# Altium PCB inverter.PcbDoc
Units mm, origin at the board's own origin, x right, y up, seen from the top; angles counter-clockwise.
Board outline 103.51 x 87.38 mm, 2 copper layers (Top Layer, Bottom Layer); 33 components, 20 nets, 87 pads, 0 vias.
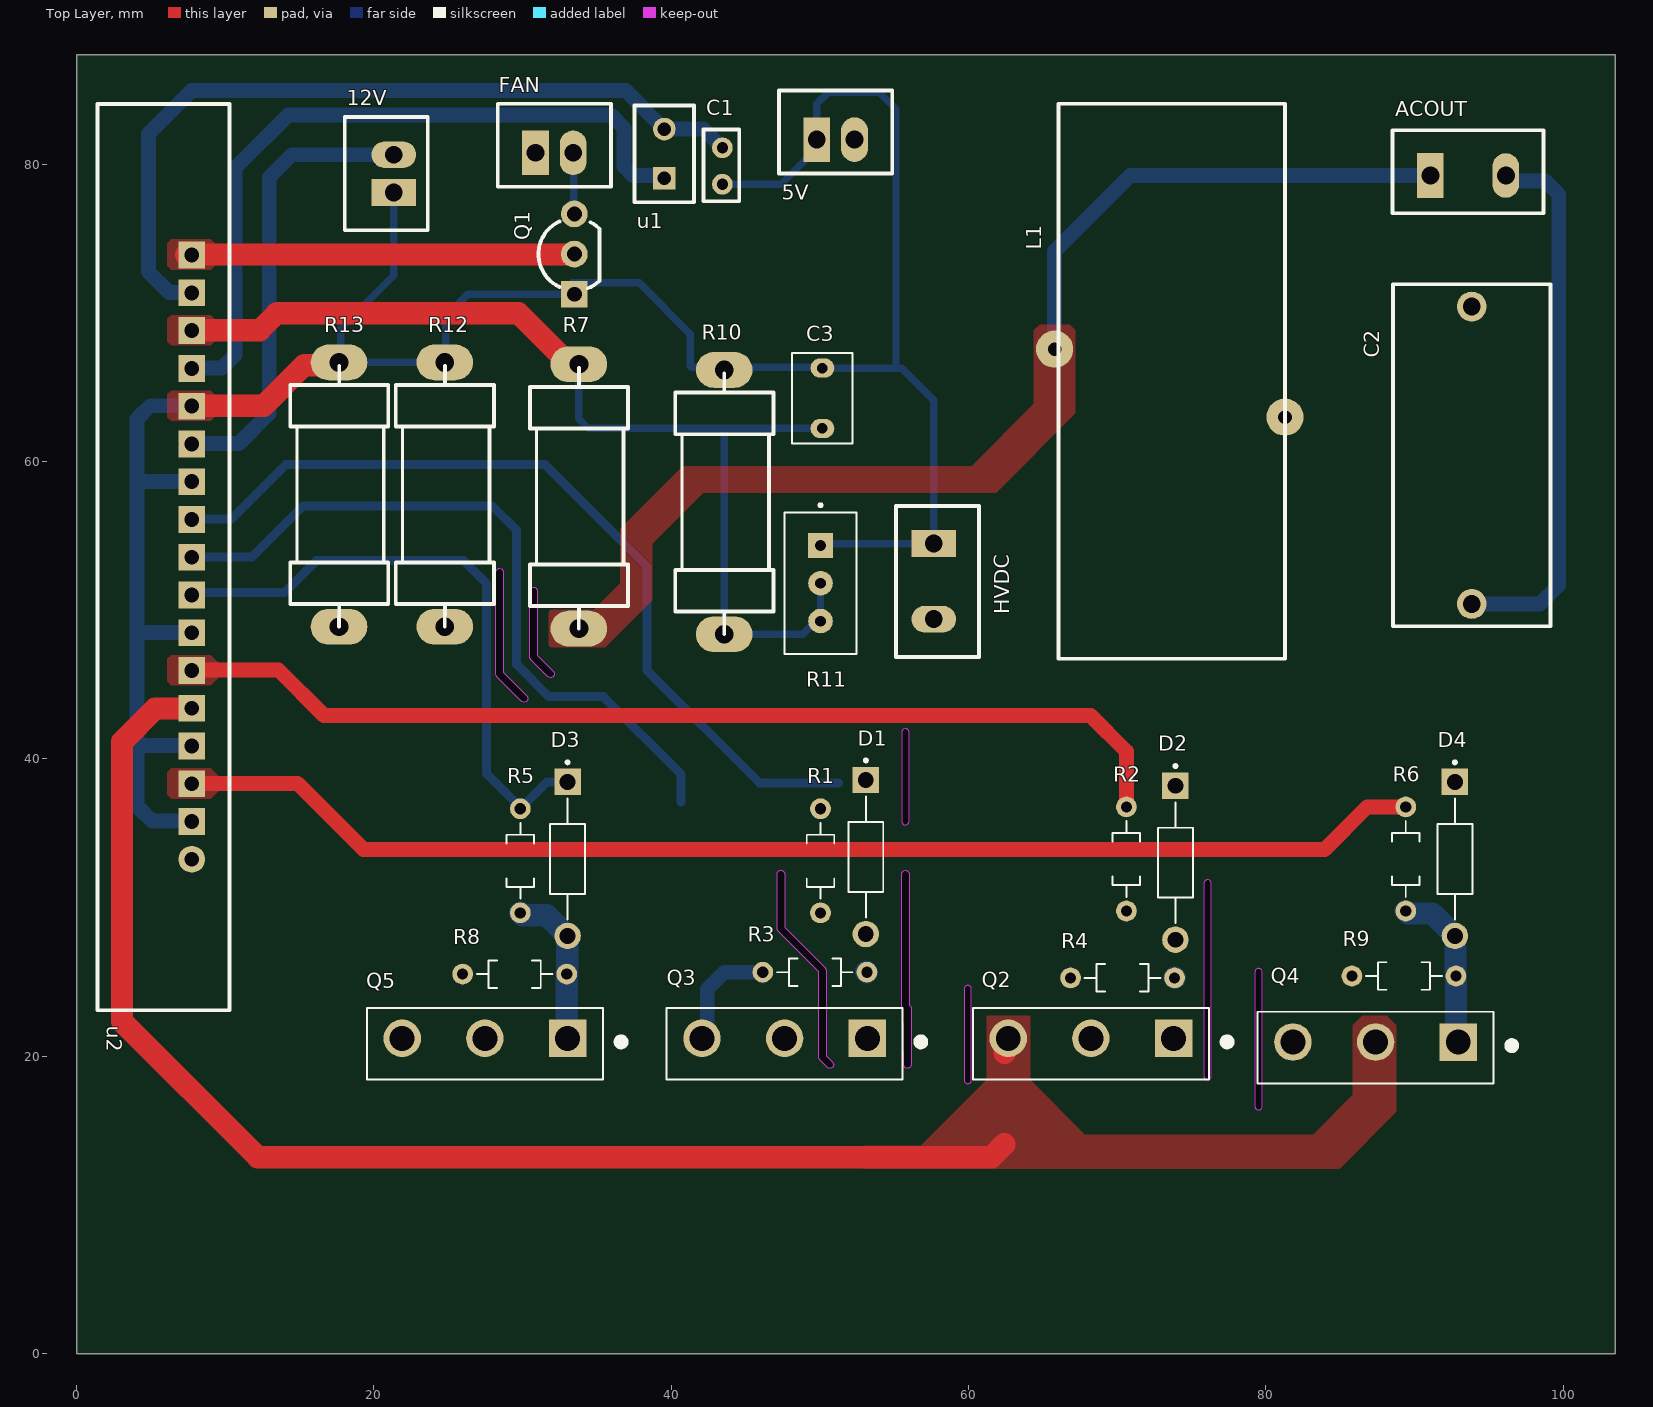
[diagram p0: Top Layer view]
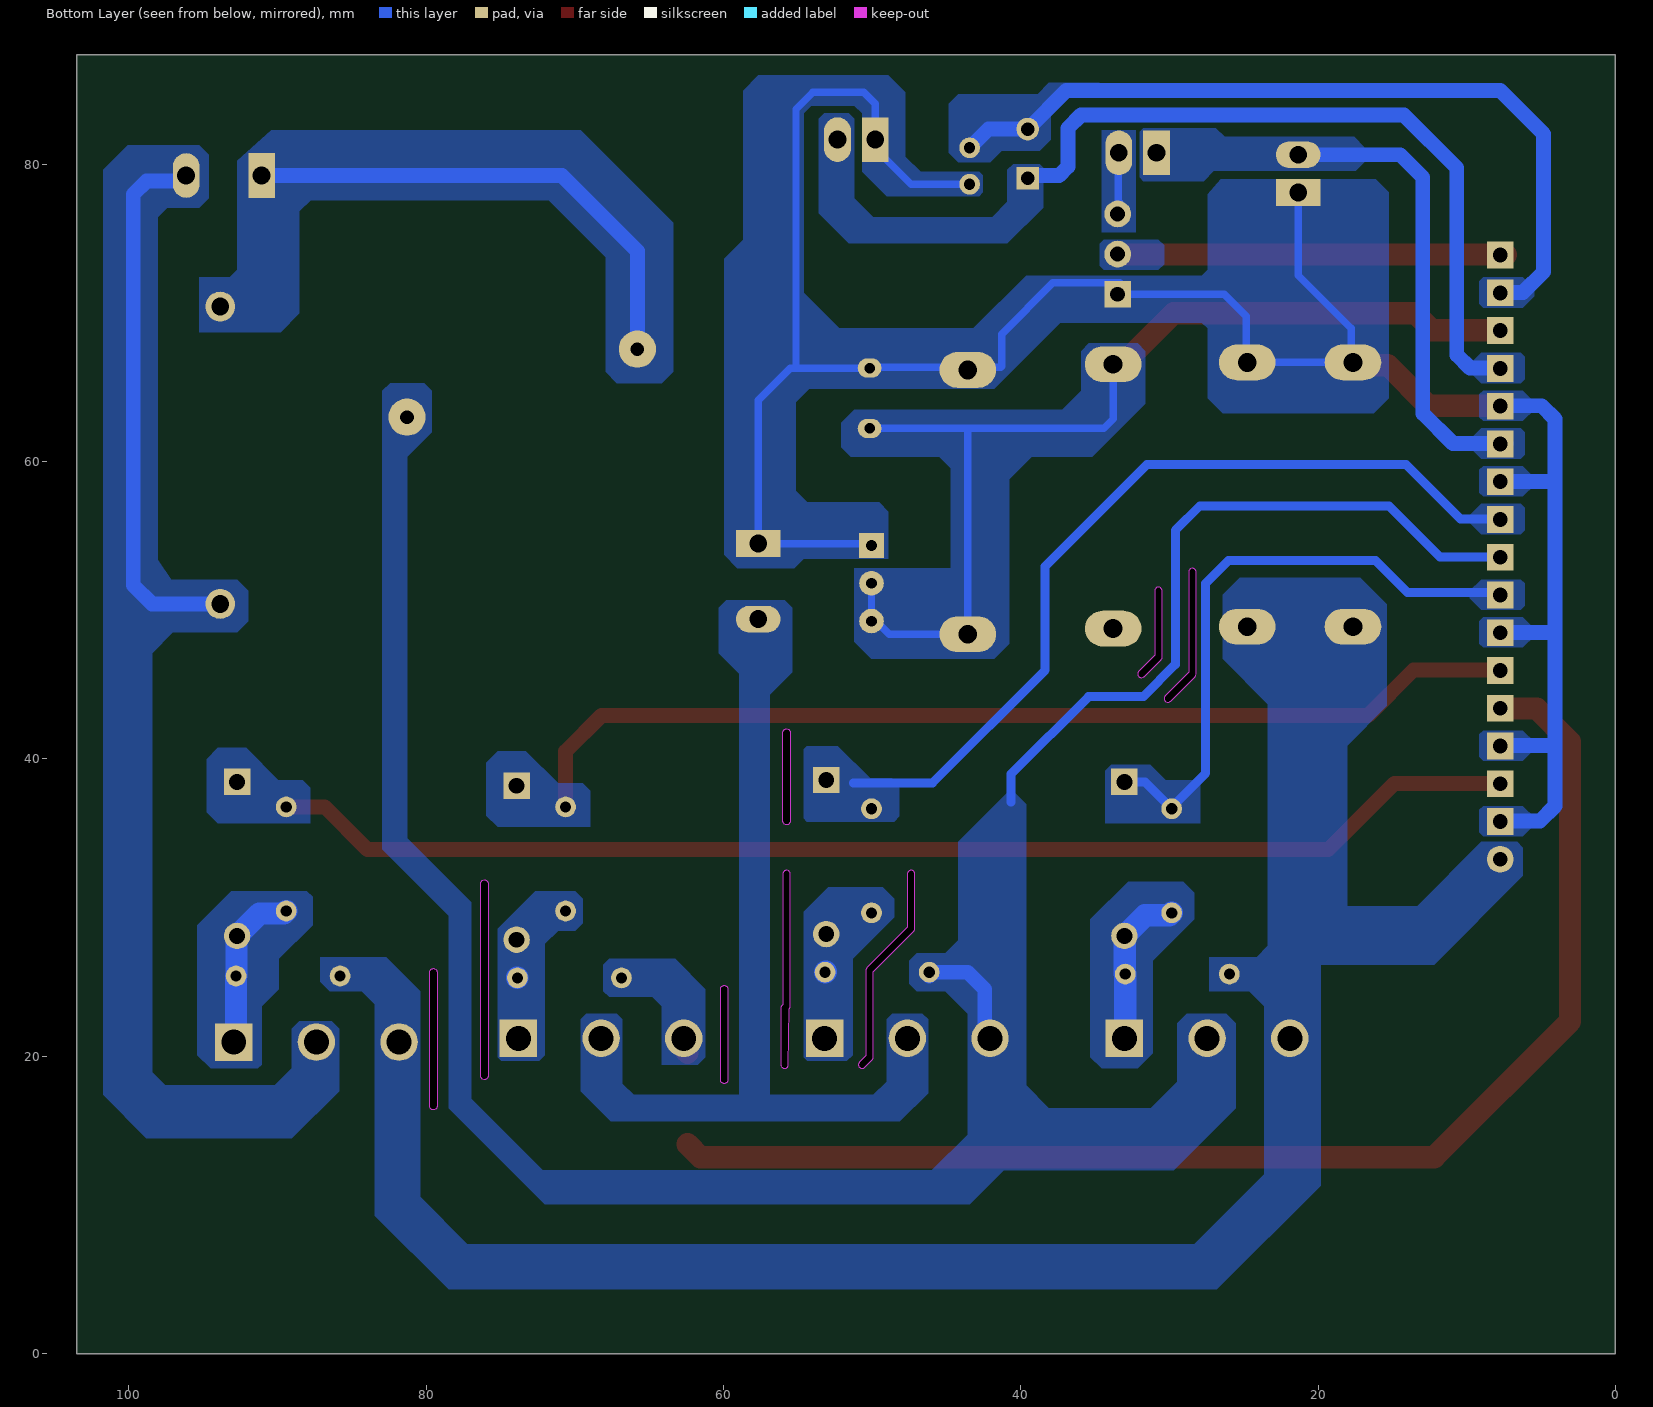
[diagram p1: Bottom Layer view, seen from below]
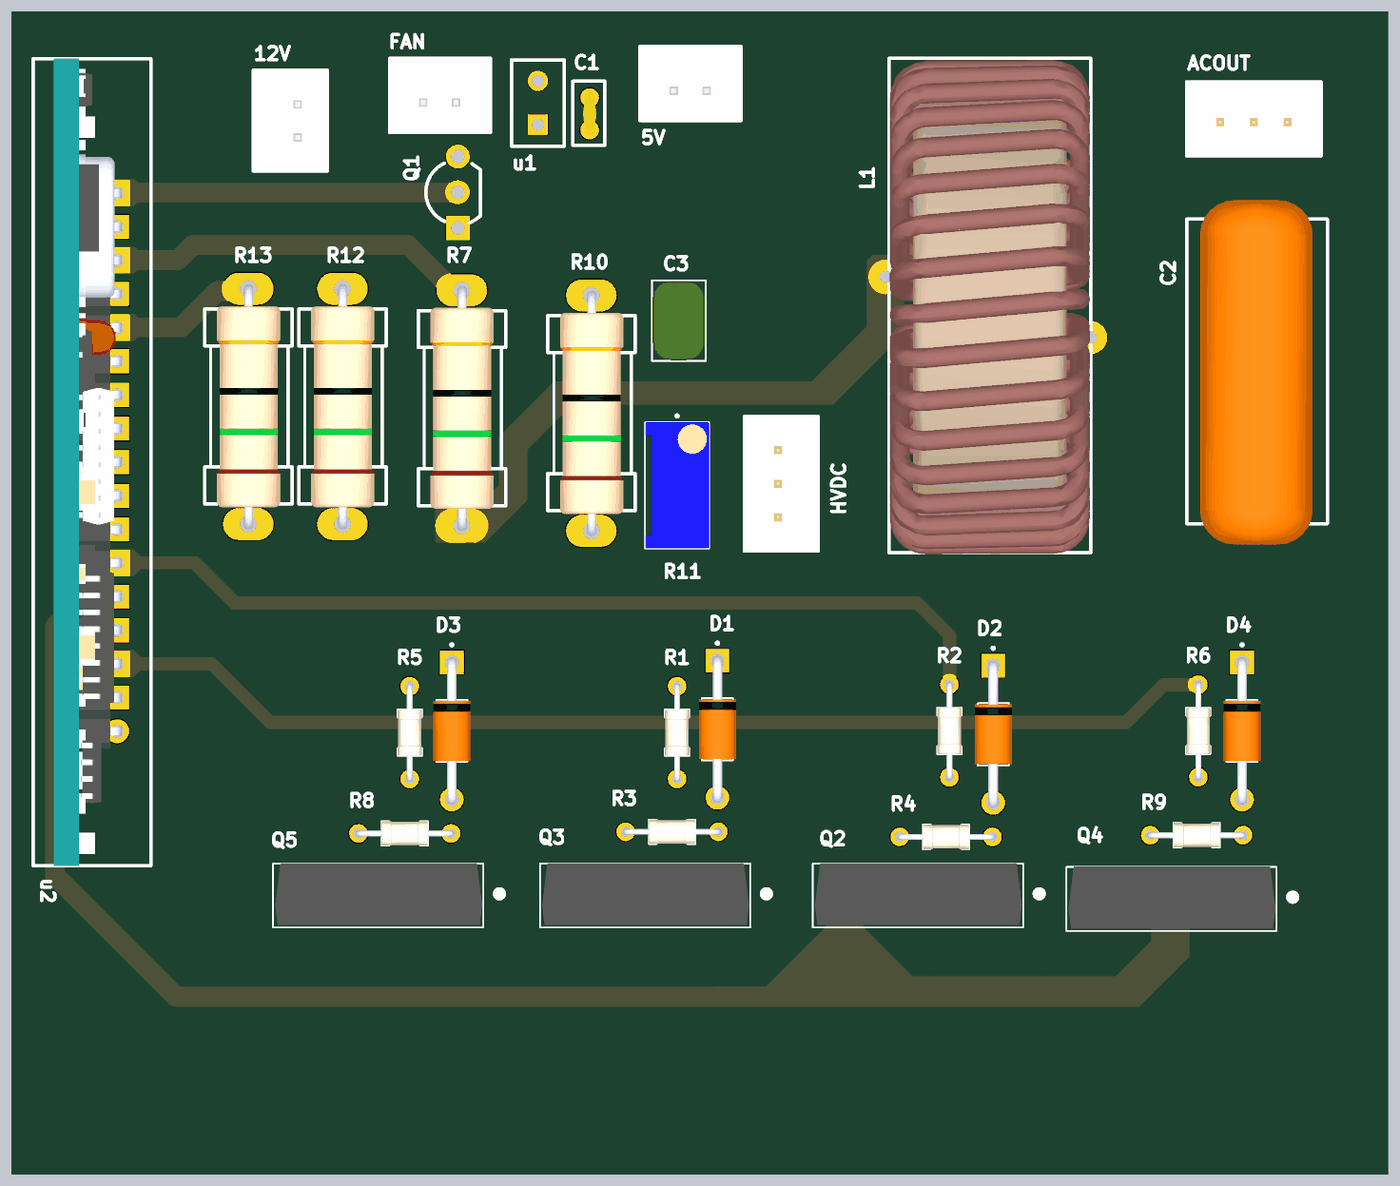
[diagram p2: 3D render of the assembled board from above, using the file's embedded part models]

## Layer stack, top to bottom
Top Solder: solder mask 0.0102, Solder Resist, Dk 3.5
Top Layer: signal copper 0.0356
Dielectric 1: dielectric 0.32, FR-4, Dk 4.8
Bottom Layer: signal copper 0.0356
Bottom Solder: solder mask 0.0102, Solder Resist, Dk 3.5

## Board outline
0,0 0,87.376 103.505,87.376 103.505,0
cut-out: 79.252,16.637 ccw(c79.502,16.637) 79.752,16.637 79.752,25.654 ccw(c79.502,25.654) 79.252,25.654
cut-out: 75.823,18.669 ccw(c76.073,18.669) 76.323,18.669 76.323,31.623 ccw(c76.073,31.623) 75.823,31.623
cut-out: 59.694,18.415 ccw(c59.944,18.415) 60.194,18.415 60.194,24.511 ccw(c59.944,24.511) 59.694,24.511
cut-out: 55.576,23.191 cw(c55.753,23.368) 55.503,23.368 55.503,32.258 cw(c55.753,32.258) 56.003,32.258 56.003,23.472 56.057,23.418 cw(c55.88,23.241) 56.13,23.241 56.13,19.431 cw(c55.88,19.431) 55.63,19.431
cut-out: 55.503,35.814 ccw(c55.753,35.814) 56.003,35.814 56.003,41.783 ccw(c55.753,41.783) 55.503,41.783
cut-out: 28.271,45.543 cw(c28.448,45.72) 28.198,45.72 28.198,52.578 cw(c28.448,52.578) 28.698,52.578 28.698,45.824 30.276,44.246 cw(c30.099,44.069) 30.349,44.069 cw(c30.099,44.069) 29.922,43.892
cut-out: 30.557,46.686 cw(c30.734,46.863) 30.484,46.863 30.484,51.308 cw(c30.734,51.308) 30.984,51.308 30.984,46.967 32.054,45.897 cw(c31.877,45.72) 32.127,45.72 cw(c31.877,45.72) 31.7,45.543
cut-out: 49.915,19.939 49.915,25.677 47.194,28.398 cw(c47.371,28.575) 47.121,28.575 47.121,32.258 cw(c47.371,32.258) 47.621,32.258 47.621,28.679 50.342,25.958 cw(c50.165,25.781) 50.415,25.781 50.415,20.043 50.85,19.608 cw(c50.673,19.431) 50.923,19.431 cw(c50.673,19.431) 50.496,19.254 49.988,19.762 cw(c50.165,19.939)

## Design rules (kind name [scope] priority, off if disabled: settings)
Clearance [All] p1: gap=0.254 ignorepadtopadclearanceinfootprint=FALSE except(0: Arc-Hole Track-Hole SMDPad-Hole THPad-Hole Via-Hole Fill-Hole Poly-Hole Region-Hole Text-Hole)
Height [All] p1: minheight=0 maxheight=50.4 prefheight=12.7
PolygonConnect [All] p1: connectstyle=Direct reliefconductorwidth=0.254 reliefentries=4 polygonreliefangle="90 Angle" airgapwidth=0.254
RoutingVias [All] p1: holewidth=0.711 width=1.27 viastyle="Through Hole" minholewidth=0.711 minwidth=1.27 maxholewidth=0.711 maxwidth=1.27
SolderMaskExpansion [All] p1: expansion=0.102 istentingtop=FALSE
Width [All] p1: maxlimit=2 minlimit=0.254 preferedwidth=0.8 minimp=50.000000 maximp=50.000000 favimp=50.000000
29 further rules are at their usual default settings.

## Components (designator, comment, footprint, x,y, rotation, side; value= is the part's Value field where it differs from the comment)
5V "2pos" 2POS 49.784,81.661 r0 top
12V "2pos" 2POS 21.336,78.105 r90 top
ACOUT "2pos" "2POS - 3" 93.599,79.248 r0 top
C1 "10NFCER" CAP-CER-2.54 43.434,79.883 r90 top
C2 "2.2uF" "CAP_TH L23" 94.107,60.325 r90 top
C3 "0.1uF" CAP-P_Pilm 50.165,64.262 r270 top
D1 "FR107" DIOAD1036W78L470D235 53.086,33.401 r270 top
D2 "FR107" DIOAD1036W78L470D235 73.914,33.02 r270 top
D3 "FR107" DIOAD1036W78L470D235 33.022,33.274 r270 top
D4 "FR107" DIOAD1036W78L470D235 92.71,33.274 r270 top
FAN "2pos" 2POS 30.861,80.772 r0 top
HVDC "2pos" "2POS - 3" 57.658,51.943 r270 top
L1 "Troidal core  3.3mH" "TOROIDAL CORE INDUCTOR" 73.66,65.278 r270 top
Q1 "SS8050" TO-92 33.528,74.041 r90 top
Q2 "FGH40N60UFD" TO-247-3LD 68.072,21.209 r180 top
Q3 "FGH40N60UFD" TO-247-3LD 47.47,21.209 r180 top
Q4 "FGH40N60UFD" TO-247-3LD 87.221,20.955 r180 top
Q5 "FGH40N60UFD" TO-247-3LD 27.307,21.209 r180 top
R1 "10R" RES-TH-7mm 50.038,33.147 r270 top
R2 "10R" RES-TH-7mm 70.612,33.274 r270 top
R3 "10K" RES-TH-7mm 49.657,25.654 r0 top
R4 "10K" RES-TH-7mm 70.358,25.273 r0 top
R5 "10R" RES-TH-7mm 29.845,33.147 r270 top
R6 "10R" RES-TH-7mm 89.408,33.274 r270 top
R7 "RES-0.5W-200K" "RES_TH 3W" 33.782,56.642 r270 top
R8 "10K" RES-TH-7mm 29.466,25.527 r0 top
R9 "10K" RES-TH-7mm 89.281,25.4 r0 top
R10 "RES-0.5W-10K" "RES_TH 3W" 43.561,56.261 r270 top
R11 "10K" TRIM_3296W-1-250 50.038,51.816 r270 top
R12 "RES-2W-2.1RRES-3W-0.2R" "RES_TH 3W" 24.765,56.769 r270 top
R13 "RES-2W-2.1RRES-3W-0.2R" "RES_TH 3W" 17.653,56.769 r270 top
u1 "10K" "NTC-TH L6.5" 39.497,80.645 r90 top
u2 "EGS002" PINHEADER_1X17_P2.54MM 7.747,53.571 r180 top

## Footprints (in the part's own frame and the unit in brackets; to place one, negate y for a bottom-side part, rotate by r counter-clockwise, add the part's x,y. Pads: shape width x height; smd on the part's side, far side on the other; paste and mask are expansions set on the pad)
2POS [mm]
  rect 1.8x3 hole 1.2: 1(0,0)
  oval 1.8x3 hole 1.2: 2(2.54,0)
  silkscreen extent -2.54,-2.29 5.08,3.3, body extent -2.47,-2.32 4.96,3.41, height 6.69
"2POS - 3" [mm]
  rect 1.8x3 hole 1.2: 1(-2.54,0)
  oval 1.8x3 hole 1.2: 2(2.54,0)
  silkscreen extent -5.08,-2.54 5.08,3.05, body extent -5.04,-2.54 5.04,3.16, height 7.01
CAP-CER-2.54 [mm]
  round 1.397 hole 0.75: 1(-1.225,0) 2(1.225,0)
  silkscreen extent -2.37,-1.14 2.46,1.27, body extent -1.62,-0.5 1.62,0.5, height 4.99
CAP-P_Pilm [mm]
  oval 1.3x1.6 hole 0.71: 1(-2.032,0) 2(2.032,0)
  silkscreen extent -3.05,-2.03 3.05,2.03, body extent -3,-2 3,2, height 12.5
"CAP_TH L23" [mm]
  round 2 hole 1.2 paste+0 mask+0.051: 1(-9.897,0.26) 2(10.103,0.26)
  silkscreen extent -11.4,-5.04 11.6,5.56, body extent -12.97,-3.93 13.03,4.57, height 19.3
DIOAD1036W78L470D235 [mm]
  rect 1.778x1.778 hole 1.06: 1(-5.18,0)
  round 1.778 hole 1.06: 2(5.18,0)
  silkscreen extent -6.6,-1.17 4.07,1.17, body extent -5.55,-1.4 5.55,1.4, height 2.8
"NTC-TH L6.5" [mil]
  rect 60x60 hole 35.43 paste+0 mask+2: 1(-62.17,-1.26)
  round 60 hole 35.43 paste+0 mask+2: 2(67.83,-1.26)
  silkscreen extent -126,-80 130,77
PINHEADER_1X17_P2.54MM [mm]
  round 1.8 hole 1: 1(0,20.32)
  rect 1.8x1.8 hole 1: 2(0,17.78) 3(0,15.24) 4(0,12.7) 5(0,10.16) 6(0,7.62) 7(0,5.08) 8(0,2.54) 9(0,0) 10(0,-2.54) 11(0,-5.08) 12(0,-7.62) 13(0,-10.16) 14(0,-12.7) 15(0,-15.24) 16(0,-17.78) 17(0,-20.32)
  silkscreen extent -2.54,-30.48 6.35,30.48, body extent -0.32,-30.5 4.78,30.5, height 33
RES-TH-7mm [mm]
  round 1.397 hole 0.75: 1(-3.5,0) 2(3.5,0)
  silkscreen extent -2.55,-0.92 2.55,0.92, body extent -3.72,-0.92 3.72,0.92, height 1.84
"RES_TH 3W" [mil] "Res_TH 3W"
  oval 95x150 hole 50: 1(-390,0) 2(310,0)
  silkscreen extent -380,-130 310,130, body extent -403,-93 325,95, height 225
TO-92 [mm]
  rect 1.8x1.8 hole 1 paste+0 mask+0.051: 1(-2.783,0.049)
  round 1.8 hole 1 paste+0 mask+0.051: 2(-0.083,0.049) 3(2.617,0.049)
  silkscreen extent -2.38,-1.65 2.12,2.46
TO-247-3LD [mm]
  rect 2.52x2.52 hole 1.68: 1(-5.715,0)
  round 2.52 hole 1.68: 2(-0.155,0) 3(5.405,0)
  silkscreen extent -9.56,-2.04 7.79,2.78, body extent -8,-2.1 7.62,2.6, height 24.75
"TOROIDAL CORE INDUCTOR" [mil]
  round 98.42 hole 36 paste+0 mask+2: 1(90,300) 2(-90,-310)
  silkscreen extent -740,-300 730,300, body extent -735,-297 735,297, height 1522
TRIM_3296W-1-250 [mil]
  rect 65x65 hole 27.95: 1(-100,0)
  round 65 hole 27.95: 2(0,0) 3(100,0)
  silkscreen extent -211,-95 188,95, body extent -188,-95 188,95, height 455

## Part data
5V 12V ACOUT FAN HVDC: "P2.54mm"
C1: "CAP: CER 1UF 50V X7R 1206", LCSC Part #=C1848, Unit Price=0.0104
C2: library part "2.2uF_film capacitor", "Cap flim 2.2uF 400V", Package=None, Check_prices=https://www.snapeda.com/parts/SR201C104KARTR1/Kyocera/view-part/?ref=eda, MF="KYOCERA AVX", MP=SR201C104KARTR1, SnapEDA_Link=https://www.snapeda.com/parts/SR201C104KARTR1/Kyocera/view-part/?ref=snap
C3: library part 0.1uF_film, "Cap Ceramic 0.1uF 100V X7R 10% Radial 2.54mm 125Â°C T/R", Package=None, Check_prices=https://www.snapeda.com/parts/SR201C104KARTR1/Kyocera/view-part/?ref=eda, MF="KYOCERA AVX", MP=SR201C104KARTR1, SnapEDA_Link=https://www.snapeda.com/parts/SR201C104KARTR1/Kyocera/view-part/?ref=snap
D1 D2 D3 D4: "DIODE: GEN 1A 1.0V@1A 1kV DO-41 TH", LCSC Part #=C36138, Unit Price=0.0313
L1: library part Inductor, "Troidal core  inductor: 220uH"
Q1: "Transistor: 25V 300mW 120@100mA,1V 1.5A NPN SOT-23", LCSC Part #=C59205, Unit Price=0.0048
Q2 Q3 Q4 Q5: "FGH40N60UFD: 600V Field-Stop IGBT with ultrafast co-pack diode, 40A class, VCE(sat) typ 1.8V @ 40A/15V, TO-247-3LD (short lead) package.", LCSC Part #=C274639, Unit Price=0.2595
R1 R2 R5 R6: "RES TH: 10R"
R3 R4 R8 R9: "RES TH: 10K"
R7: "RES: 200K OHM 1% 0.5W TH"
R10: "RES: 10K OHM 1% 0.5W TH"
R11: library part "10K POT", "RES TH: 10K POT"
R12 R13: library part RES-2W-0.2R, "RES: 0.2OHM 1% 2W TH"
u1: library part "NTC 10K", "NTC TH: 10K"
u2: "EGS002 SPWM Pure Sine Wave Inverter Driver Board"

## Nets (pads, with @x,y where several pads share a name; then routed paths per layer and width w, separated by ;. In a path a pad name is that pad's centre, name@x,y a point inside that pad or via, vN(x,y) a via of type N, cw(c..) or ccw(c..) an arc to the next point about the centre after c; other vN are vias at no path point)
1HO: D2.1 R2.1 u2.6 | length 69
  Top Layer w1: u2.6@7.62,45.974 13.589,45.974 16.637,42.926 68.199,42.926 70.612,40.513 R2.1
  Bottom Layer w1.5: D2.1@73.887,38.227 D2.1
1LO: D4.1 R6.1 u2.3 | length 84.9
  Top Layer w1: u2.3@7.62,38.354 14.859,38.354 19.304,33.909 83.947,33.909 86.812,36.774 R6.1
  Bottom Layer w1.5: D4.1@92.683,38.481 D4.1
2HO: D1.1 R1.1 u2.10 | length 58.4
  Bottom Layer w0.6: u2.10@7.62,56.134 10.414,56.134 14.097,59.817 31.496,59.817 38.354,52.959 38.354,45.974 45.933,38.395 51.259,38.395 ; R1.1 R1.1@50.21,36.819
2LO: D3.1 R5.1 u2.8 | length 41.6
  Bottom Layer w0.6: u2.8@7.62,51.054 7.77,51.204 13.993,51.204 16.129,53.34 26.035,53.34 27.559,51.816 27.559,39.04 29.845,36.754 R5.1 31.652,38.454 D3.1
380v: HVDC.2 Q2.2 Q3.2 | length 0
  Bottom Layer w1: Q2.2@68.199,21.181 Q2.2
+5: 5V.2 u1.1 u2.14 | length 49.6
  Bottom Layer w1: u2.14@7.62,66.294 9.779,66.294 10.668,67.183 10.668,79.756 14.224,83.312 35.941,83.312 36.83,82.423 36.83,79.834 37.416,79.248 39.347,79.248 u1.1
+12: 12V.2 FAN.1 u2.12 | length 31.5
  Bottom Layer w1: u2.12@7.366,61.214 10.922,61.214 12.954,63.246 12.954,79.121 14.478,80.645 12V.2 ; FAN.1@30.734,80.645 FAN.1
FAN: Q1.2 u2.17 | length 26.1
  Top Layer w1.5: u2.17@7.366,73.914 7.62,73.914 7.642,73.936 33.457,73.936 Q1.2
GND: 5V.1 12V.1 C1.1 C3.1 HVDC.1 Q1.1 R10.1 R11.1 R12.1 R13.1 u2.2 u2.4 u2.7 u2.11 u2.13 | length 168.1
  Top Layer w1.5: u2.13@7.62,63.754 12.573,63.754 15.31,66.491 17.469,66.491 R13.1
  Bottom Layer w0.5: 12V.1 21.336,72.517 17.78,68.961 17.78,66.675 R12.1 ; R12.1@24.819,66.548 24.819,69.777 26.3,71.258 Q1.1 ; Q1.1@33.352,72.02 37.835,72.02 41.275,68.58 41.275,66.421 41.338,66.358 49.481,66.358 C3.1@49.799,66.04 ; C1.1 47.381,78.658 49.784,81.061 5V.1 49.784,84.074 50.546,84.836 53.975,84.836 55.118,83.693 55.118,66.344 ; R11.1 50.165,54.483 HVDC.1 ; C3.1 55.499,66.294 ; 55.534,66.259 57.658,64.135 HVDC.1@57.658,54.61
  Bottom Layer w1: u2.2@7.62,35.814 5.08,35.814 4.064,36.83 4.064,41.148 ; u2.4@7.62,40.894 4.318,40.894 4.064,41.148 ; u2.7@7.62,48.514 4.318,48.514 4.064,48.768 ; u2.13@7.62,63.754 4.953,63.754 4.064,62.865 4.064,58.674 ; u2.11 4.087,58.651 4.064,58.674 ; 4.064,41.148 4.064,48.768 ; 4.064,48.768 4.064,58.674
IFB: Q4.3 Q5.3 R8.1 R9.1 R12.2 R13.2 u2.1 | length 0.2
  Bottom Layer w1: R12.2@24.638,48.768 R12.2
NetACOUT_1: ACOUT.1 C2.2 L1.2 R7.2 | length 34.2
  Top Layer w1: L1.2@65.659,67.437 L1.2
  Bottom Layer w1: L1.2 65.786,74.168 70.866,79.248 ACOUT.1
NetD1_2: D1.2 Q3.1 R1.2 R3.2 | length 0.1
  Bottom Layer w1.5: R3.2@53.122,25.689 R3.2 ; Q3.1@53.157,21.237 Q3.1
NetD2_2: D2.2 Q2.1 R2.2 R4.2 | length 0.2
  Bottom Layer w1.5: Q2.1 Q2.1@73.858,21.28 ; R4.2 R4.2@73.886,25.301 ; D2.2@73.886,27.812 D2.2
NetD3_2: D3.2 Q5.1 R5.2 R8.2 | length 10.8
  Bottom Layer w1.5: R5.2 30.015,29.477 31.639,29.477 D3.2 32.994,28.066 32.994,25.555 R8.2 32.966,21.265 Q5.1
NetD4_2: D4.2 Q4.1 R6.2 R9.2 | length 11.2
  Bottom Layer w1.5: R6.2 89.58,29.602 91.202,29.602 D4.2 92.745,28.059 92.745,25.436 R9.2 92.781,21.11 Q4.1
NetFAN_2: FAN.2 Q1.3 | length 4.1
  Bottom Layer w0.5: Q1.3@33.352,77.42 33.44,77.508 33.44,81.319 FAN.2@33.528,81.407
TFB: C1.2 u1.2 u2.16 | length 54.1
  Bottom Layer w1: u2.16@7.62,71.374 6.223,71.374 4.826,72.771 4.826,82.042 7.747,84.963 36.934,84.963 u1.2 42.174,82.368 C1.2
VFB: C3.2 R7.1 R10.2 R11.2 R11.3 u2.15 | length 71.6
  Top Layer w1.5: u2.15@7.62,68.834 12.319,68.834 13.462,69.977 29.718,69.977 33.147,66.548 R7.1
  Bottom Layer w0.5: R7.1 33.782,62.865 34.417,62.23 43.561,62.23 ; R11.2 R11.3 49.727,49.276 48.838,48.387 R10.2 43.561,62.23 ; C3.2 43.561,62.23
VS1: ACOUT.2 C2.1 Q2.3 Q4.2 R4.1 u2.5 | length 125.7
  Top Layer w1.5: u2.5@7.62,43.434 7.263,43.434 7.22,43.391 5.291,43.391 3.048,41.148 3.048,22.352 12.192,13.208 61.541,13.208 62.42,14.087 ; Q2.3@62.42,20.241 62.472,20.293 62.472,21.014 Q2.3
  Bottom Layer w1: C2.1 98.434,50.428 99.695,51.689 99.695,77.978 98.806,78.867 96.52,78.867 ACOUT.2
VS2: L1.1 Q3.3 Q5.2 R3.1 u2.9 | length 57
  Bottom Layer w0.6: u2.9@7.62,53.594 11.811,53.594 15.24,57.023 27.94,57.023 29.591,55.372 29.591,46.355 31.75,44.196 35.433,44.196 40.64,38.989 40.64,37.104
  Bottom Layer w1: Q3.3@42.037,21.181 Q3.3 42.418,21.562 42.418,24.511 43.561,25.654 R3.1 R3.1@46.157,25.411

## Polygon pours and split planes (outlines as drawn)
2HO on Bottom Layer "2HO_L02_P066" (solid, pour order 66): 48.514,35.787 48.16,36.141 48.16,36.993 48.16,38.2 48.668,38.708 50.138,38.708 52.297,40.867 54.383,40.867 54.61,40.64 54.61,36.014 54.383,35.787
NetACOUT_1 on Bottom Layer "Bottom Layer-NetC2_2" (solid, pour order 32): 67.92,66.04 67.158,65.278 64.135,65.278 63.373,66.04 63.373,76.073 69.596,82.296 90.424,82.296 92.71,80.239 92.71,72.898 93.218,72.39 95.25,72.39 95.25,68.707 89.789,68.707 88.519,69.977 88.519,76.835 87.757,77.597 71.755,77.597 67.92,73.762
2LO on Bottom Layer "2LO_L02_P067" (solid, pour order 67): 33.909,39.624 34.319,39.214 34.319,37.642 34.319,35.66 27.94,35.66 27.94,38.581 30.255,38.581 31.298,39.624
1LO on Bottom Layer "1LO_L02_P065" (solid, pour order 65): 88.292,38.581 87.784,38.073 87.784,37.12 87.784,35.66 94.007,35.66 94.769,36.422 94.769,39.978 94.007,40.74 92.102,40.74 89.943,38.581
TFB on Bottom Layer "TFB_L02_P063" (solid, pour order 63): 38.862,84.709 38.1,85.471 34.544,85.471 35.306,84.709 37.084,84.709 37.973,83.82 37.973,81.661 38.735,80.899 41.275,80.899 42.037,80.137 44.196,80.137 44.831,80.772 44.831,84.074 44.196,84.709
IFB on Bottom Layer "Bottom Layer-IFB" (solid, pour order 64): 83.439,23.495 84.328,24.384 86.487,24.384 87.122,25.019 87.122,26.67 82.677,26.67 80.391,24.384 80.391,10.541 77.216,7.366 28.321,7.366 23.622,12.065 23.622,23.368 24.638,24.384 27.305,24.384 27.305,26.67 24.13,26.67 23.368,27.432 23.368,43.688 26.416,46.736 26.416,51.054 25.273,52.197 17.145,52.197 15.367,50.419 15.367,43.561 18.034,40.894 18.034,30.099 13.335,30.099 9.017,34.417 6.604,34.417 6.223,34.036 6.223,32.131 12.192,26.162 19.812,26.162 19.812,11.303 26.797,4.318 78.486,4.318 83.439,9.271
+5 on Bottom Layer "+5_L02_P062" (solid, pour order 62): 38.481,79.756 38.735,80.01 39.497,80.01 40.513,80.01 40.894,79.629 40.894,78.74 40.894,77.47 41.91,76.454 49.911,76.454 51.181,77.724 51.181,83.058 51.562,83.439 53.213,83.439 53.594,83.058 53.594,76.708 51.562,74.676 40.894,74.676 38.481,77.089
+12 on Bottom Layer "+12_L02_P061" (solid, pour order 61): 16.891,80.137 17.477,79.551 27.002,79.551 27.686,78.867 31.75,78.867 32.004,79.121 32.004,82.169 31.75,82.423 26.875,82.423 26.289,81.837 17.575,81.837 16.891,81.153
FAN on Bottom Layer "FAN_L02_P060" (solid, pour order 60): 34.417,72.898 34.699,73.18 34.699,74.648 34.417,74.93 30.734,74.93 30.353,74.549 30.353,73.279 30.734,72.898
TFB on Bottom Layer "TFB_L02_P053" (solid, pour order 53): 8.89,72.39 9.144,72.136 9.144,70.612 8.89,70.358 6.223,70.358 5.461,71.12 5.461,71.628 6.223,72.39
+5 on Bottom Layer "+5_L02_P052" (solid, pour order 52): 6.35,65.278 6.096,65.532 6.096,67.056 6.35,67.31 9.017,67.31 9.779,66.548 9.779,66.04 9.017,65.278
GND on Bottom Layer "GND_L02_P051" (solid, pour order 51): 8.89,64.77 9.144,64.516 9.144,62.992 8.89,62.738 6.223,62.738 5.461,63.5 5.461,64.008 6.223,64.77
+12 on Bottom Layer "+12_L02_P050" (solid, pour order 50): 6.35,60.198 6.096,60.452 6.096,61.976 6.35,62.23 9.017,62.23 9.779,61.468 9.779,60.96 9.017,60.198
GND on Bottom Layer "GND_L02_P049" (solid, pour order 49): 8.89,59.69 9.144,59.436 9.144,57.912 8.89,57.658 6.223,57.658 5.461,58.42 5.461,58.928 6.223,59.69
2HO on Bottom Layer "2HO_L02_P048" (solid, pour order 48): 6.35,55.118 6.096,55.372 6.096,56.896 6.35,57.15 9.017,57.15 9.779,56.388 9.779,55.88 9.017,55.118
2LO on Bottom Layer "2LO_L02_P046" (solid, pour order 46): 6.35,50.038 6.096,50.292 6.096,51.816 6.35,52.07 9.017,52.07 9.779,51.308 9.779,50.8 9.017,50.038
GND on Bottom Layer "GND_L02_P045" (solid, pour order 45): 8.89,36.83 9.144,36.576 9.144,35.052 8.89,34.798 6.223,34.798 5.461,35.56 5.461,36.068 6.223,36.83
GND on Bottom Layer "GND_L02_P044" (solid, pour order 44): 8.89,41.91 9.144,41.656 9.144,40.132 8.89,39.878 6.223,39.878 5.461,40.64 5.461,41.148 6.223,41.91
GND on Bottom Layer "GND_L02_P043" (solid, pour order 43): 8.89,49.53 9.144,49.276 9.144,47.752 8.89,47.498 6.223,47.498 5.461,48.26 5.461,48.768 6.223,49.53
NetD3_2 on Bottom Layer "NETD3_2_L02_P041" (solid, pour order 41): 32.766,31.75 35.306,29.21 35.306,19.939 34.544,19.177 32.131,19.177 31.115,20.193 31.115,26.416 28.321,29.21 28.321,30.988 29.083,31.75
NetD1_2 on Bottom Layer "NETD1_2_L02_P038" (solid, pour order 38): 49.276,31.369 52.959,31.369 54.61,29.718 54.61,19.939 54.356,19.685 51.689,19.685 51.308,20.066 51.308,26.543 48.514,29.337 48.514,30.607
VS1 on Bottom Layer "VS1_L02_P037" (solid, pour order 37): 64.135,19.431 64.135,23.368 64.77,24.003 67.691,24.003 68.072,24.384 68.072,26.162 67.691,26.543 63.246,26.543 61.214,24.511 61.214,19.939 61.722,19.431
NetD2_2 on Bottom Layer "NETD2_2_L02_P036" (solid, pour order 36): 69.469,28.956 69.977,28.448 71.12,28.448 72.009,27.559 72.009,26.416 72.009,20.066 72.39,19.685 74.93,19.685 75.184,19.939 75.184,28.575 72.644,31.115 69.977,31.115 69.469,30.607
1HO on Bottom Layer "1HO_L02_P035" (solid, pour order 35): 69.469,38.354 68.961,37.846 68.961,36.893 68.961,35.433 75.184,35.433 75.946,36.195 75.946,39.751 75.184,40.513 73.279,40.513 71.12,38.354
NetD4_2 on Bottom Layer "NETD4_2_L02_P034" (solid, pour order 34): 88.011,31.115 87.63,30.734 87.63,28.829 89.916,26.543 89.916,24.511 91.059,23.368 91.059,19.431 91.313,19.177 94.488,19.177 95.377,20.066 95.377,28.829 93.091,31.115
VS1 on Bottom Layer "Bottom Layer-VS1" (solid, pour order 28): 88.519,22.352 89.027,21.844 89.027,19.177 90.17,18.034 97.536,18.034 98.425,18.923 98.425,47.117 97.028,48.514 92.71,48.514 91.948,49.276 91.948,51.308 92.71,52.07 97.155,52.07 98.044,53.403 98.044,76.454 97.409,77.089 95.25,77.089 94.615,77.724 94.615,80.645 95.25,81.28 100.076,81.28 101.727,79.629 101.727,17.399 98.806,14.478 89.027,14.478 85.852,17.653 85.852,21.844 86.36,22.352
GND on Bottom Layer "Bottom Layer-GND" (solid, pour order 18): 42.545,78.105 42.799,77.851 49.022,77.851 50.673,79.502 50.673,83.439 51.181,83.947 54.102,83.947 54.61,83.439 54.61,71.374 52.197,68.961 43.18,68.961 39.624,72.517 27.813,72.517 27.432,72.898 27.432,77.996 26.559,78.994 16.129,78.994 15.24,78.105 15.24,64.262 16.256,63.246 26.416,63.246 27.432,64.262 27.432,68.961 27.813,69.342 37.338,69.342 41.783,64.897 54.229,64.897 55.118,64.008 55.118,58.039 54.356,57.277 49.53,57.277 48.895,56.642 48.895,53.467 54.61,53.467 55.245,52.832 59.055,52.832 59.944,53.721 59.944,73.66 58.674,74.93 58.674,84.963 57.658,85.979 48.895,85.979 47.752,84.836 47.752,80.518 46.736,79.502 44.64,79.502 42.799,79.502 42.545,79.248
NetFAN_2 on Bottom Layer "NETFAN_2_L02_P008" (solid, pour order 8): 32.258,82.296 34.544,82.296 34.544,75.438 32.258,75.438
VFB on Bottom Layer "VFB_L02_P006" (solid, pour order 6): 51.435,60.325 52.07,60.96 52.07,62.611 51.181,63.5 37.211,63.5 35.941,64.77 35.941,67.437 35.433,67.945 32.131,67.945 31.623,67.437 31.623,63.881 35.179,60.325 39.243,60.325 40.767,58.801 40.767,47.752 41.783,46.736 50.038,46.736 51.181,47.879 51.181,52.832 44.704,52.832 44.704,59.563 45.466,60.325
VS2 on Bottom Layer "VS2_L02_P000" (solid, pour order 0): 80.137,65.278 79.629,64.77 79.629,61.976 81.28,60.325 81.28,34.671 76.962,30.353 76.962,17.145 72.136,12.319 45.974,12.319 43.561,14.732 43.561,22.86 45.085,24.384 46.99,24.384 47.498,24.892 47.498,26.416 46.99,26.924 45.085,26.924 44.196,27.813 44.196,34.417 40.894,37.719 40.386,37.719 39.624,36.957 39.624,18.034 38.1,16.51 31.242,16.51 29.464,18.288 29.464,22.225 28.829,22.86 26.162,22.86 25.527,22.225 25.527,16.51 29.718,12.319 41.148,12.319 43.434,10.033 72.009,10.033 78.486,16.51 78.486,29.464 82.931,33.909 82.931,64.77 82.423,65.278
380v on Bottom Layer "380V_L02_P001" (solid, pour order 1): 46.228,22.479 46.609,22.86 48.641,22.86 49.022,22.479 49.022,18.288 49.911,17.399 56.896,17.399 56.896,44.323 55.372,45.847 55.372,50.165 55.88,50.673 56.896,50.673 59.817,50.673 60.325,50.165 60.325,47.117 58.928,45.72 58.928,17.399 66.04,17.399 66.802,18.161 66.802,22.479 67.183,22.86 69.215,22.86 69.596,22.479 69.596,17.653 67.564,15.621 48.133,15.621 46.228,17.526
NetACOUT_1 on Top Layer "NETACOUT_1_L01_P010" (solid, pour order 10): 64.77,69.215 64.389,68.834 64.389,66.548 64.389,63.881 60.198,59.69 40.767,59.69 36.576,55.499 36.576,51.816 34.798,50.038 31.877,50.038 31.75,49.911 31.75,47.625 31.877,47.498 35.56,47.498 38.735,50.673 38.735,54.483 42.164,57.912 61.849,57.912 67.183,63.246 67.183,68.834 66.802,69.215
GND on Top Layer "GND_L01_P059" (solid, pour order 59): 6.35,62.738 6.096,62.992 6.096,64.516 6.35,64.77 9.017,64.77 9.779,64.008 9.779,63.5 9.017,62.738
1LO on Top Layer "1LO_L01_P055" (solid, pour order 55): 6.35,37.338 6.096,37.592 6.096,39.116 6.35,39.37 9.017,39.37 9.779,38.608 9.779,38.1 9.017,37.338
VFB on Top Layer "VFB_L01_P058" (solid, pour order 58): 6.35,67.818 6.096,68.072 6.096,69.596 6.35,69.85 9.017,69.85 9.779,69.088 9.779,68.58 9.017,67.818
FAN on Top Layer "FAN_L01_P057" (solid, pour order 57): 6.361,72.909 6.107,73.163 6.107,74.687 6.361,74.941 9.028,74.941 9.79,74.179 9.79,73.671 9.028,72.909
1HO on Top Layer "1HO_L01_P056" (solid, pour order 56): 6.35,44.958 6.096,45.212 6.096,46.736 6.35,46.99 9.017,46.99 9.779,46.228 9.779,45.72 9.017,44.958
VS1 on Top Layer "VS1_L01_P009" (solid, pour order 9): 88.138,22.733 88.773,22.098 88.773,16.256 84.963,12.446 52.959,12.446 52.959,13.97 56.769,13.97 61.214,18.415 61.214,22.733 64.135,22.733 64.135,18.415 67.818,14.732 83.185,14.732 85.852,17.399 85.852,22.098 86.487,22.733

## Silkscreen, mask and mechanical layers (free items; w line width, h text height)
Mechanical 1:
  lines w0.5: 28.448,52.578 28.448,45.72 30.099,44.069 ; 30.734,51.308 30.734,46.863 31.877,45.72 ; 47.371,32.258 47.371,28.575 50.165,25.781 50.165,19.939 50.673,19.431 ; 55.753,32.258 55.753,23.368 55.88,23.241 55.88,19.431 ; 55.753,35.814 55.753,41.783 ; 59.944,18.415 59.944,24.511 ; 76.073,18.669 76.073,31.623 ; 79.502,16.637 79.502,25.654
Board Shape:
  the board outline again, w0.5